# Allegro board TUTORIAL FINAL USE THIS ONE V2.brd
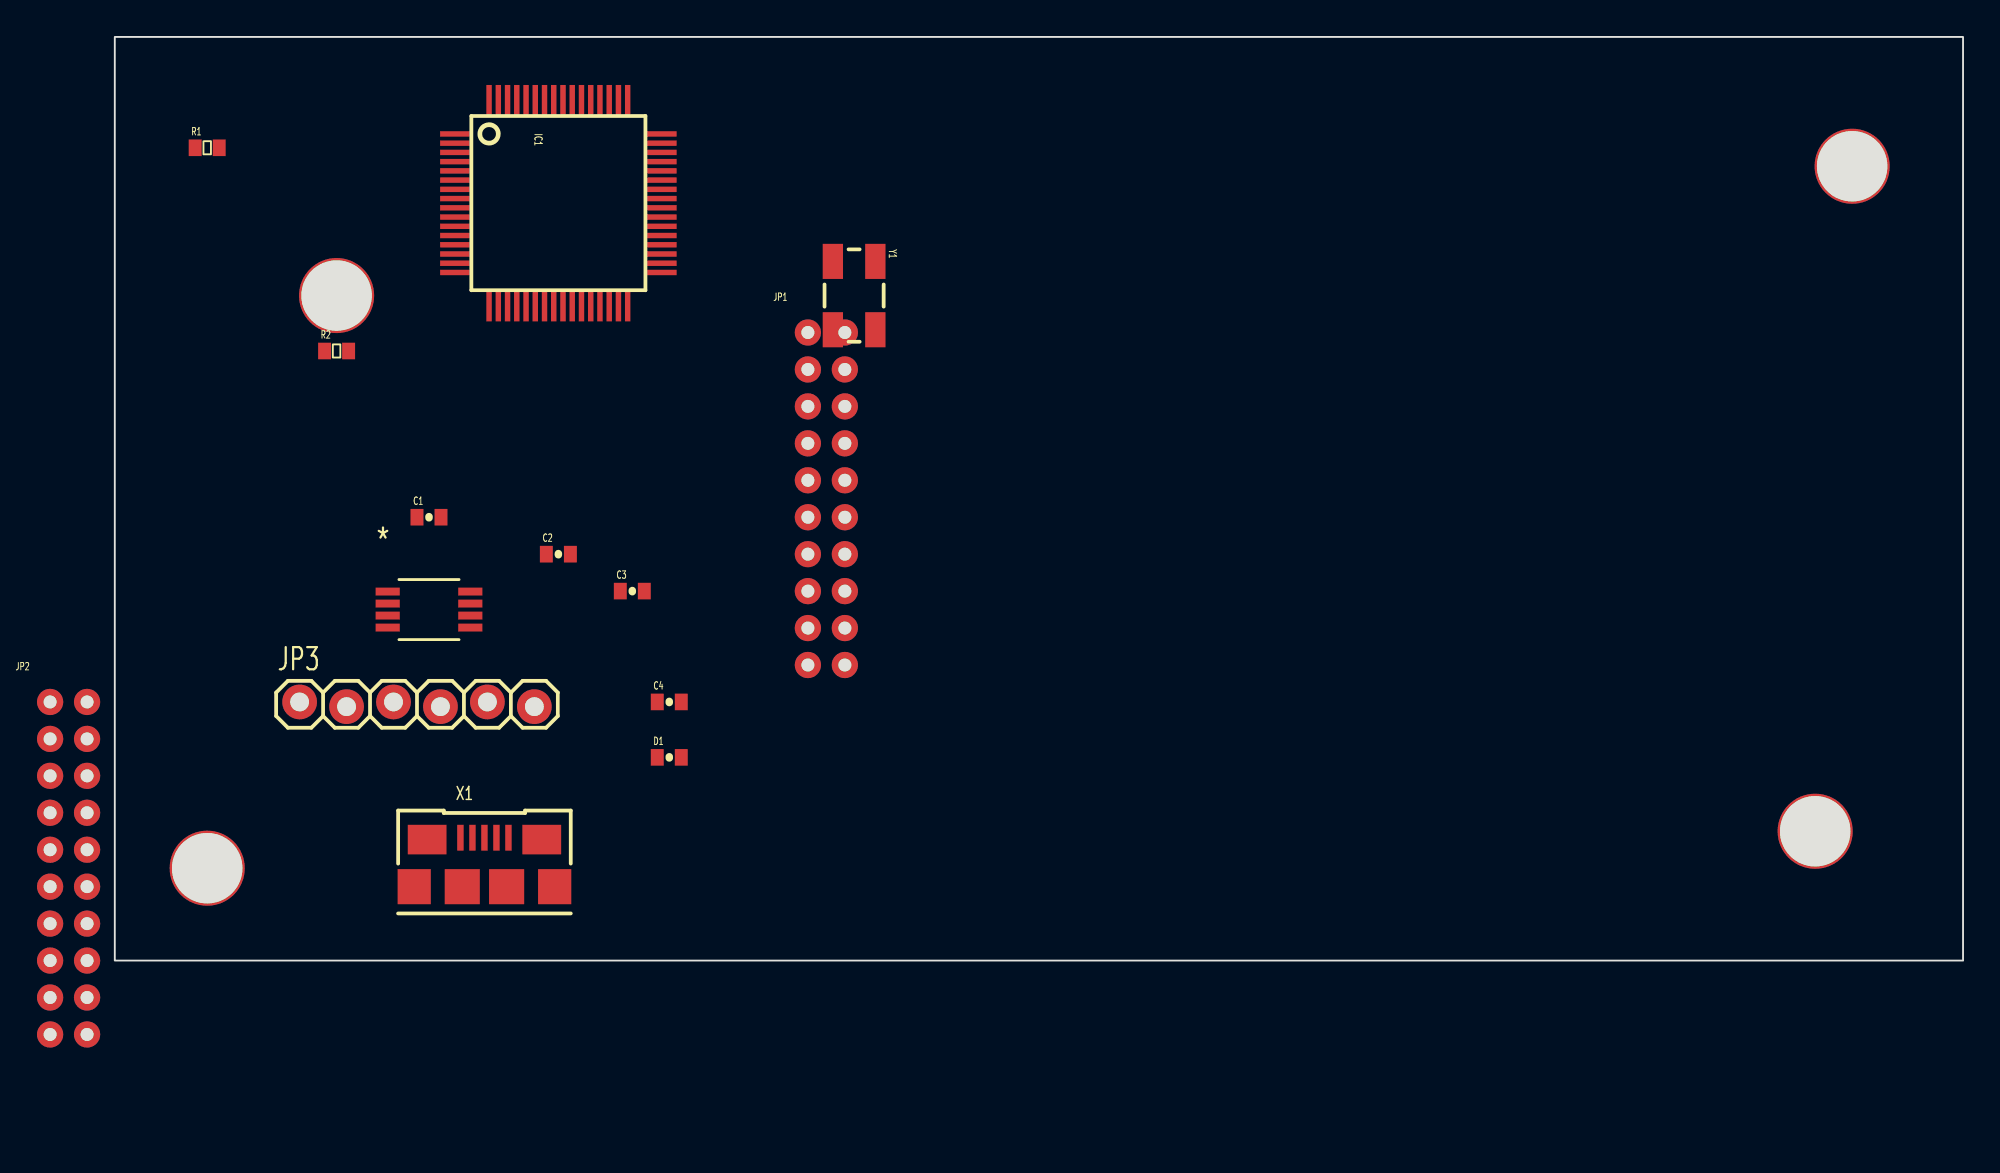
[diagram p0: board, top side]
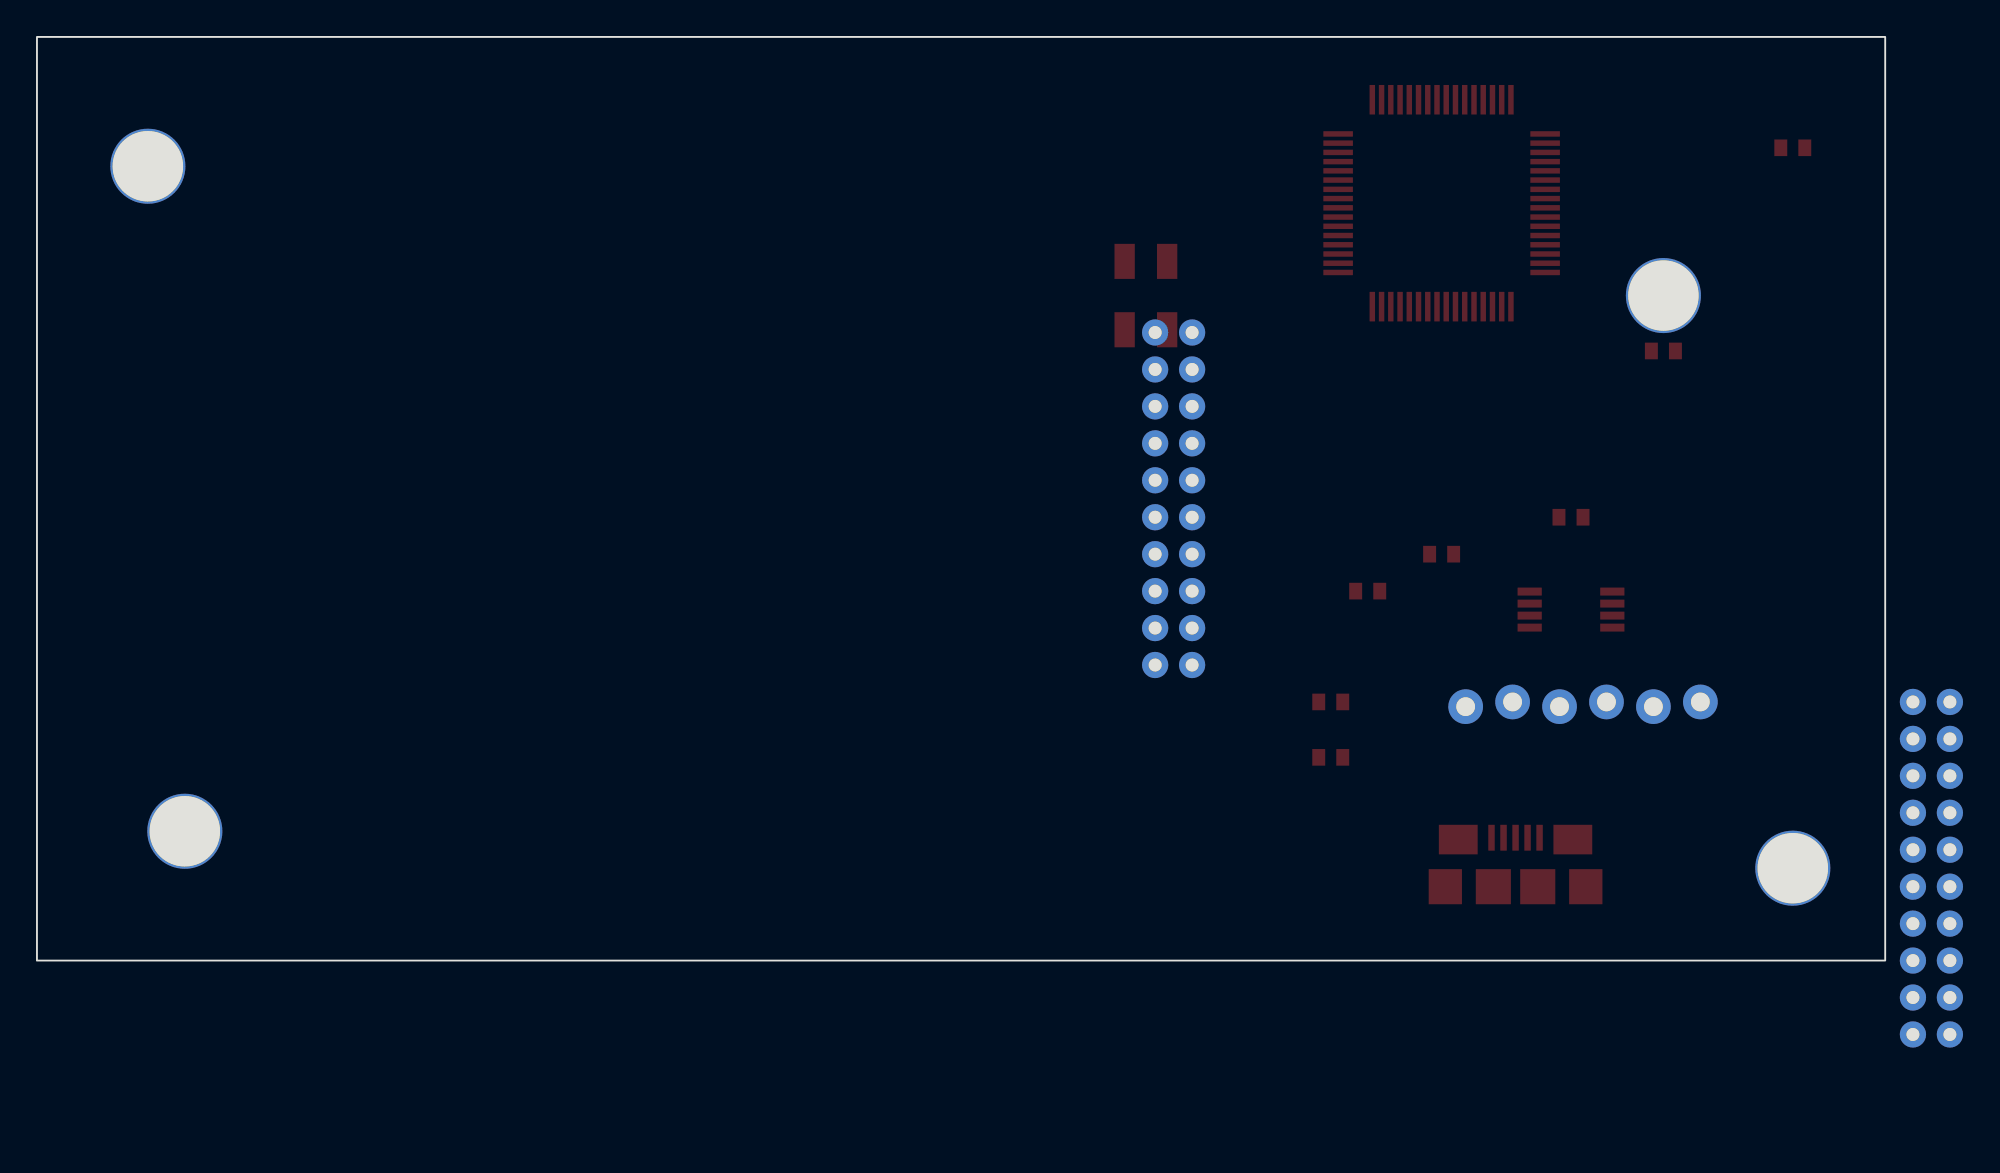
[diagram p1: board, bottom side, seen from below]

Outline 100 x 50 mm; copper layers: TOP, GND PLANE, MIDSIG, BOTTOM. Coordinates in mm from the lower left corner of the outline.
Outline path: rectangle 0,0 100,50

## Design rules (mm)
constraint set DEFAULT: min track width 0.127
net group DIFFSD: nets SDF0 SDF1

## Placement (name value [footprint] x y rotation side)
C1  1uF  [0402-CAP]  17 24 0 top
C2  1uF  [0402-CAP]  24 22 0 top
C3  1uF  [0402-CAP]  28 20 0 top
C4  CAP NP  [0402-CAP]  30 14 0 top
D1  LED  [0402-CAP]  30 11 0 top
IC1  PIC32MX440F512H-doop  [SQFP-S-10X10-64]  24 41 0 top
JP1  -  [XTEND-DIGI-MODEM]  65 25 0 top
JP2  -  [XTEND-DIGI-MODEM]  24 5 0 top
JP3  PIC 32 PROG  [1X06_LOCK]  10 14 0 top
NOREF  -  [unnamed]  12 36 0 top
NOREF#2  -  [unnamed]  5 5 0 top
NOREF#3  -  [unnamed]  92 7 0 top
NOREF#4  -  [unnamed]  94 43 0 top
R1  RESISTOR  [0402-RES]  5 44 0 top
R2  RESISTOR  [0402-RES]  12 33 0 top
U1  LT1965EMS8E-1P5  [MSOP_8_ADI]  17 19 0 top
X1  USB-B  [USB-MICROB]  20 4 0 top
Y1  CRYSTAL  [CRYSTAL-SMD]  40 36 0 top

## Library data of the parts
C1-C4 = CAP NP
D1 = LED
IC1 = PIC32MX440F512H
JP1 JP2 = XTEND-DIGI-MODEM
JP3 = M06_LOCK
R1 R2 = RESISTOR
U1 = LT1965EMS8E-1P5_0: User Part Number: PN; Tolerance: TOL
X1 = USB-MICROB
Y1 = CRYSTAL

## Footprints (pads in the part's own frame, mm; a bottom-side part is the same pattern mirrored in y, then rotated)
1X06_LOCK
  round 1.88 hole 1.016: 1(0,0) 2(2.54,-0.254) 3(5.08,0) 4(7.62,-0.254) 5(10.16,0) 6(12.7,-0.254)
0402-CAP
  rect 0.7x0.9 smd: 1(-0.65,0) 2(0.65,0)
0402-RES
  rect 0.7x0.9 smd: 1(-0.65,0) 2(0.65,0)
CRYSTAL-SMD
  rect 1.1x1.9 smd: 1(-1.15,1.85) 2(-1.15,-1.85) 3(1.15,-1.85) 4(1.15,1.85)
MSOP_8_ADI
  rect 1.31x0.431 smd: 1(-2.235,0.975) 2(-2.235,0.325) 3(-2.235,-0.325) 4(-2.235,-0.975) 5(2.235,-0.975) 6(2.235,-0.325) 7(2.235,0.325) 8(2.235,0.975)
SQFP-S-10X10-64
  rect 1.6x0.295 smd: 1(-5.6,3.75) 2(-5.6,3.25) 3(-5.6,2.75) 4(-5.6,2.25) 5(-5.6,1.75) 6(-5.6,1.25) 7(-5.6,0.75) 8(-5.6,0.25) 9(-5.6,-0.25) 10(-5.6,-0.75) 11(-5.6,-1.25) 12(-5.6,-1.75) 13(-5.6,-2.25) 14(-5.6,-2.75) 15(-5.6,-3.25) 16(-5.6,-3.75) 33(5.6,-3.75) 34(5.6,-3.25) 35(5.6,-2.75) 36(5.6,-2.25) 37(5.6,-1.75) 38(5.6,-1.25) 39(5.6,-0.75) 40(5.6,-0.25) 41(5.6,0.25) 42(5.6,0.75) 43(5.6,1.25) 44(5.6,1.75) 45(5.6,2.25) 46(5.6,2.75) 47(5.6,3.25) 48(5.6,3.75)
  rect 0.295x1.6 smd: 17(-3.75,-5.6) 18(-3.25,-5.6) 19(-2.75,-5.6) 20(-2.25,-5.6) 21(-1.75,-5.6) 22(-1.25,-5.6) 23(-0.75,-5.6) 24(-0.25,-5.6) 25(0.25,-5.6) 26(0.75,-5.6) 27(1.25,-5.6) 28(1.75,-5.6) 29(2.25,-5.6) 30(2.75,-5.6) 31(3.25,-5.6) 32(3.75,-5.6) 49(3.75,5.6) 50(3.25,5.6) 51(2.75,5.6) 52(2.25,5.6) 53(1.75,5.6) 54(1.25,5.6) 55(0.75,5.6) 56(0.25,5.6) 57(-0.25,5.6) 58(-0.75,5.6) 59(-1.25,5.6) 60(-1.75,5.6) 61(-2.25,5.6) 62(-2.75,5.6) 63(-3.25,5.6) 64(-3.75,5.6)
unnamed
  round 4.064 hole 3.81: (0,0)
USB-MICROB
  rect 0.35x1.4 smd: D+(0,2.65) D-(-0.65,2.65) GND(1.3,2.65) ID(0.65,2.65) VBUS(-1.3,2.65)
  rect 1.8x1.9 smd: MT1(-3.8,0) MT2(3.8,0)
  rect 2.1x1.6 smd: MT3(-3.1,2.55) MT4(3.1,2.55)
  rect 1.9x1.9 smd: P_1(-1.2,0) P_2(1.2,0)
XTEND-DIGI-MODEM
  round 0 hole 3.3 unplated: (-26.5,14.5) (-26.5,-14.5) (26.5,14.5) (26.5,-14.5)
  round 1.422 hole 0.7: 1(-27.5,9) 2(-25.5,9) 3(-27.5,7) 4(-25.5,7) 5(-27.5,5) 6(-25.5,5) 7(-27.5,3) 8(-25.5,3) 9(-27.5,1) 10(-25.5,1) 11(-27.5,-1) 12(-25.5,-1) 13(-27.5,-3) 14(-25.5,-3) 15(-27.5,-5) 16(-25.5,-5) 17(-27.5,-7) 18(-25.5,-7) 19(-27.5,-9) 20(-25.5,-9)

## Nets
3.3V: IC1.11 IC1.13 IC1.14 IC1.15 IC1.16 JP2.12
GND: U1.4
GND_2: U1.5
VCC: IC1.7(_MCLR) IC1.10 IC1.19 IC1.26 IC1.38 IC1.56 IC1.57
DERP0: IC1.44 IC1.46
DERP1: IC1.45 IC1.49
DERP2: IC1.47 IC1.50
DERP3: IC1.48 IC1.51
DERP4: IC1.43 IC1.52
DURP0: IC1.18 JP3.2
DURP1: IC1.21 JP3.1
HURP0: IC1.23 JP3.6
HURP1: IC1.24 JP3.5
HURP2: IC1.27 JP3.4
SDF0: IC1.20 IC1.28
SDF1: IC1.29 IC1.41
SDF2: IC1.25 IC1.30

Pads without a net: C1 1 2; C2 1 2; C3 1 2; C4 1 2; D1 1 2; IC1 1 2 3 4 5 6 8 9 12 17 22 31 32 33 34 35 36 37 39 40 42 53 54 55 58 59 60 61 62 63 64; JP1 1 2 3 4 5 6 7 8 9 10 11 12 13 14 15 16 17 18 19 20; JP2 1 2 3 4 5 6 7 8 9 10 11 13 14 15 16 17 18 19 20; JP3 3; R1 1 2; R2 1 2; U1 1 2 3 6 7 8; X1 D+ D- GND ID MT1 MT2 MT3 MT4 P_1 P_2 VBUS; Y1 1 2 3 4
